# EAGLE board LimitSwitch_mshield-v3 (EAGLE 7.2.0)
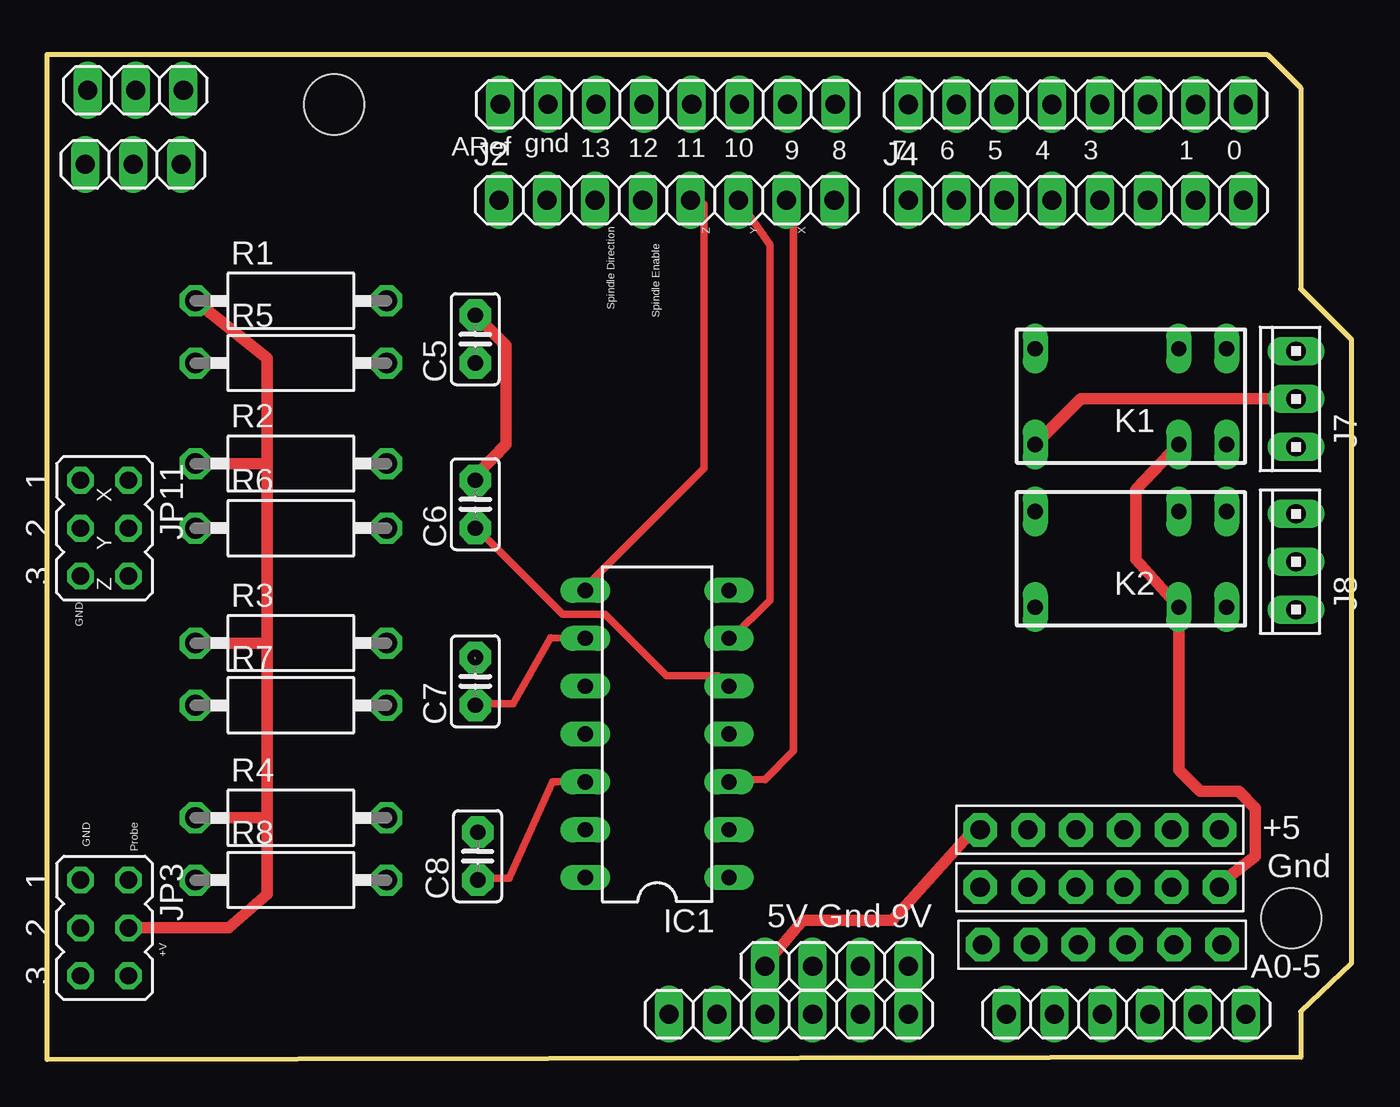
[diagram p0: board, top side]
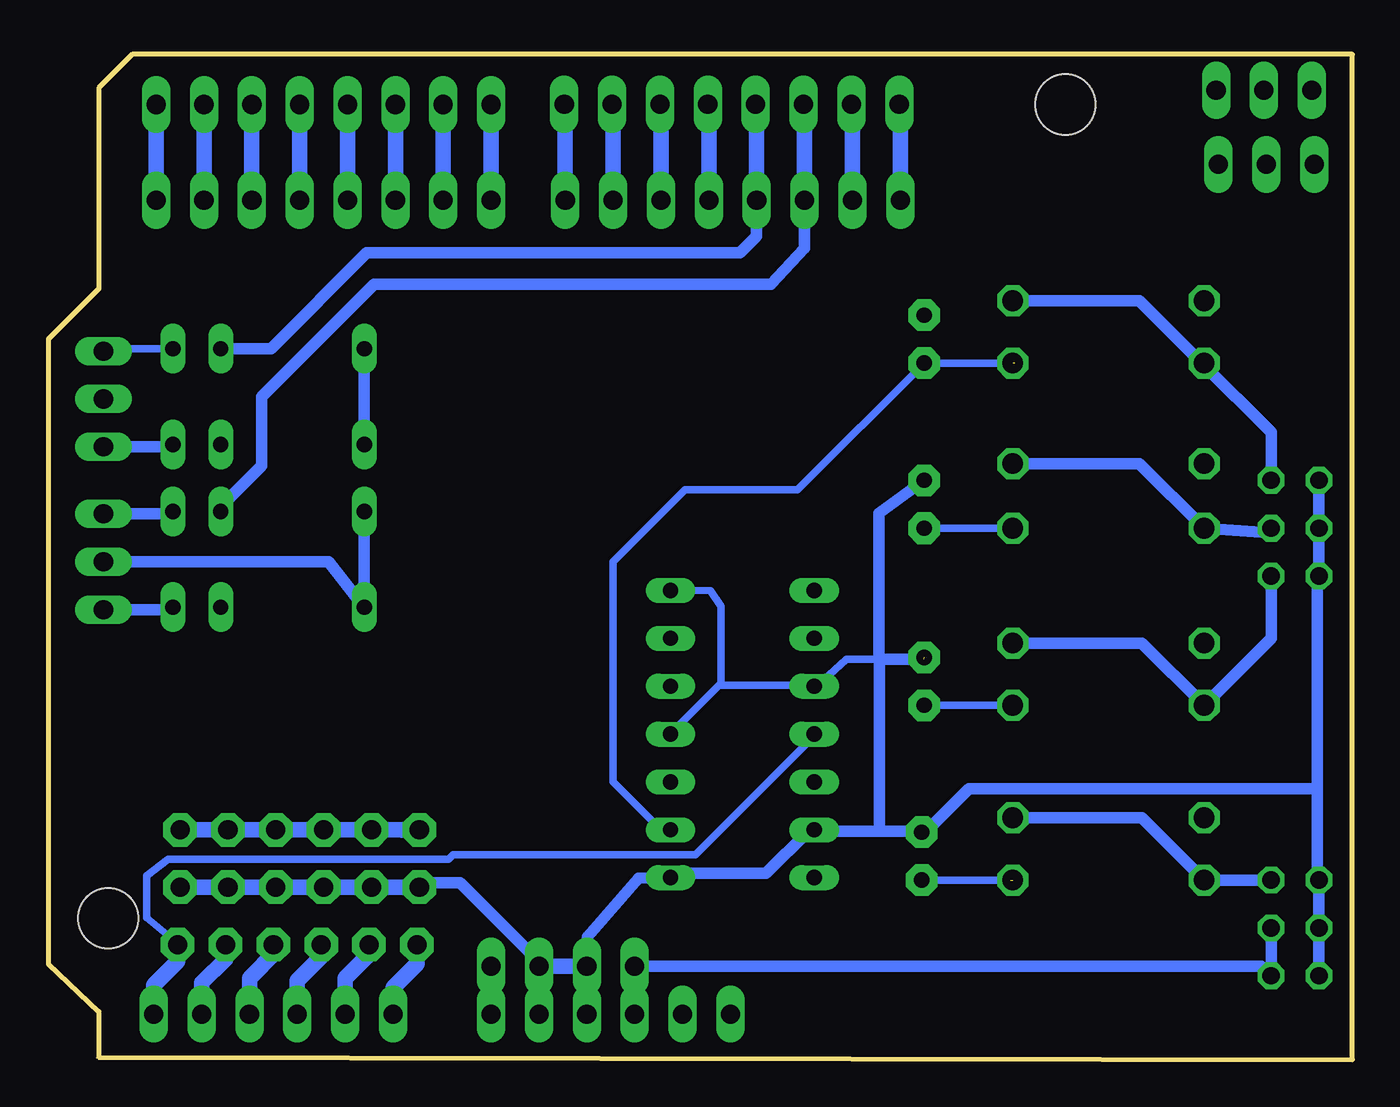
[diagram p1: board, bottom side, seen from below]

Size 69.29 x 53.35 mm. Coordinates in mm from the lower left corner, seen from the top.
Outline: 69.28,38.2 66.55,40.87 66.55,51.63 64.83,53.35 0,53.35 0,0 66.68,0.09
Outline: 69.13,5.05 69.13,5.05 66.55,2.5 66.57,0
Outline: 69.21,5.08 69.22,38.36
Copper layers (1*16): Top 0.035mm / dielectric 1.5mm / Bottom 0.035mm
Design rules "default": minimum track width 16mil, minimum drill 19mil, track to track 12mil, track to pad 12mil, pad to pad 12mil, via to via 12mil, smd to smd 0mil, copper to edge 10mil, drill to drill 8mil, minimum pad ring 10mil, minimum via ring 8mil, stop-mask expansion 4mil, vias tented up to drill 0mil, thermal gap 10mil
Net classes: 1 power: width 0.61 mm
Holes 3.2 mm at 66.04,7.5 15.24,50.68
Milling: 9 lines

## Footprints (pad centres in the part's own frame; a part is rotated, then mirrored left to right if it is on the bottom)
C025-025X050 = drill 0.813 pad 1.676 octagon: 1 -1.27,0; 2 1.27,0
DIL14 = drill 0.813 long: 1 -7.62,-3.81; 2 -5.08,-3.81; 3 -2.54,-3.81; 4 0,-3.81; 5 2.54,-3.81; 6 5.08,-3.81; 7 7.62,-3.81; 8 7.62,3.81; 9 5.08,3.81; 10 2.54,3.81; 11 0,3.81; 12 -2.54,3.81; 13 -5.08,3.81; 14 -7.62,3.81
1X08 = drill 1.016 long: 1 -8.89,0; 2 -6.35,0; 3 -3.81,0; 4 -1.27,0; 5 1.27,0; 6 3.81,0; 7 6.35,0; 8 8.89,0
10X03MTA = drill 1.016 long: 1 2.54,0; 2 0,0; 3 -2.54,0
1X06 = drill 1.016 long: 1 -6.35,0; 2 -3.81,0; 3 -1.27,0; 4 1.27,0; 5 3.81,0; 6 6.35,0
JP3Q = drill 0.914 octagon: 1 -2.54,-1.27; 2 -2.54,1.27; 3 0,-1.27; 4 0,1.27; 5 2.54,-1.27; 6 2.54,1.27
1X04 = drill 1.016 long: 1 -3.81,0; 2 -1.27,0; 3 1.27,0; 4 3.81,0
1X06-BIG = drill 1.016 pad 1.778 octagon: 1 -6.35,0; 2 -3.81,0; 3 -1.27,0; 4 1.27,0; 5 3.81,0; 6 6.35,0
G5V1 = drill 0.813 long: 1 -5.08,-2.54; 2 -2.54,-2.54; 5 5.08,-2.54; 6 5.08,2.54; 9 -2.54,2.54; 10 -5.08,2.54
VMTA55 = drill 1.1 octagon: 1 -5.08,0; 2 5.08,0
1X03 = drill 1.016 long: 1 -2.54,0; 2 0,0; 3 2.54,0

## Placement (x,y rotation side)
C5  [C025-025X050]  22.73,38.23 90 top
C6  [C025-025X050]  22.73,29.47 90 top
C7  [C025-025X050]  22.73,20.07 90 top
C8  [C025-025X050]  22.86,10.8 90 top
DRILEGEND  [DRILEGEND]  -1.65,-3.93 0 top  (outside the outline)
IC1  74LS126N  [DIL14]  32.38,17.28 90 top
J1  [1X08]  54.61,50.68 180 top
J2  [1X08]  32.89,45.6 0 top
J3  [1X08]  32.95,50.7 180 top
J4  [1X08]  54.61,45.6 0 top
J7  [10X03MTA]  66.29,35.06 90 top
J8  [10X03MTA]  66.29,26.42 90 top
JP1  [1X06]  39.37,2.42 0 top
JP2  [1X06]  57.27,2.42 0 top
JP3  [JP3Q]  3.04,6.99 270 top
JP4  [1X04]  41.91,4.96 0 top
JP5  [1X06-BIG]  56,6.1 0 top
JP8  [1X06-BIG]  55.88,12.2 0 top
JP10  [1X06-BIG]  55.88,9.15 0 top
JP11  [JP3Q]  3.04,28.2 270 top
K1  G5V1  [G5V1]  57.53,35.18 180 top
K2  G5V1  [G5V1]  57.53,26.55 180 top
R1  [VMTA55]  12.95,40.26 0 top
R2  [VMTA55]  12.95,31.63 0 top
R3  [VMTA55]  12.95,22.1 0 top
R4  [VMTA55]  12.95,12.83 0 top
R5  [VMTA55]  12.95,36.96 0 top
R6  [VMTA55]  12.95,28.2 0 top
R7  [VMTA55]  12.95,18.8 0 top
R8  [VMTA55]  12.95,9.53 0 top
SER1  [1X03]  4.7,51.44 180 top
SERVO_2  [1X03]  4.57,47.5 180 top

## Library data of the parts
C5-C8 = adafruit
DRILEGEND = drilegend
IC1 = 74xx-us
J1-J4 JP1 JP2 JP4 SER1 SERVO_2 = pinhead
J7 J8 = con-amp
JP3 JP11 = jumper
JP5 JP8 JP10 = carduino
K1 K2 = relay; MPN: G5V-1-DC24; OC_FARNELL: 9949593; OC_NEWARK: 36M6377
R1-R8 = resistor

## Nets
9V: JP1.6 JP4.4
GND [power]: C5.2 C6.2 C7.2 C8.2 IC1.1 IC1.4 IC1.7 IC1.10 IC1.13 JP1.4 JP1.5 JP3.1 JP3.3 JP3.5 JP4.2 JP4.3 JP10.1 JP10.2 JP10.3 JP10.4 JP10.5 JP10.6 JP11.1 JP11.3 JP11.5 K1.9 K2.9
N$1: J7.2 K1.5 K1.6
N$2: JP2.1 JP5.1
N$3: JP2.2 JP5.2
N$4: JP2.3 JP5.3
N$5: JP2.4 JP5.4
N$6: JP2.5 JP5.5
N$7: J2.8 J3.1
N$8: IC1.11 JP2.6 JP5.6
N$9: IC1.6 J2.6 J3.3
N$10: IC1.8 J2.5 J3.4
N$11: J2.4 J3.5 K1.2
N$12: J2.3 J3.6 K2.2
N$13: J8.2 K2.5 K2.6
N$14: J2.2 J3.7
N$15: J2.1 J3.8
N$16: J1.8 J4.1
N$17: J1.7 J4.2
N$18: J1.6 J4.3
N$19: J1.5 J4.4
N$20: J1.4 J4.5
N$21: J1.3 J4.6
N$22: J1.2 J4.7
N$23: J1.1 J4.8
N$25: JP11.2 R1.2 R5.1
N$26: J7.1 K1.1
N$27: C6.1 IC1.5 R6.2
N$28: JP11.4 R2.2 R6.1
N$29: C7.1 IC1.9 R7.2
N$30: JP11.6 R3.2 R7.1
N$31: C8.1 IC1.12 R8.2
N$32: JP3.2 R4.2 R8.1
N$33: IC1.3 J2.7 J3.2
N$34: J7.3 K1.10
N$35: J8.1 K2.1
N$36: J8.3 K2.10
N$37: C5.1 IC1.2 R5.2
V+: JP1.3 JP3.4 JP3.6 JP4.1 JP8.1 JP8.2 JP8.3 JP8.4 JP8.5 JP8.6 R1.1 R2.1 R3.1 R4.1
VCC: IC1.14

## Tracks (layer width: path | path; a pad name or v marks a point on that pad's centre or on a via)
9V
  Bottom 0.813: JP1.6 45.72,4.2 45.59,4.32 45.72,4.45 JP4.4
GND  (1 unrouted)
  Top 0.61: K1.9 57.78,30.23 57.78,26.55 K2.9 60.07,15.37 61.21,14.23 63.24,14.23 64.13,13.34 64.13,10.8 62.48,9.53 JP10.6 | 22.87,39.63 C5.2 22.87,39.38 24.37,37.88 24.37,32.65 22.87,31.13 C6.2 22.87,30.88
  Bottom 0.406: 25.13,21.26 26.86,21.26 28.37,19.88 IC1.10 28.87,19.88 33.52,19.88 | 33.52,19.88 33.62,19.88 36.12,17.38 IC1.4 | IC1.7 34.08,24.88 33.52,24.07 33.52,19.88 | 22.86,21.21 C7.2
  Bottom 0.61: JP11.1 JP11.3 JP11.5 1.87,25.38 1.87,14.38 | JP3.5 JP3.3 JP3.1 1.87,9.63 1.87,14.38 | JP10.1 49.24,9.38 47.37,9.38 43.37,5.38 JP4.3 43.12,5.25 | 22.74,21.26 25.12,21.26 | 25.12,21.26 25.13,21.26 25.13,29 22.87,30.63 C6.2 | 25.12,12.13 22.87,12.13 C8.2 22.62,12.13 20.37,14.38 1.87,14.38 | 25.12,12.13 28.37,12.13 IC1.13 28.87,12.13 31.12,9.88 36.12,9.88 IC1.1 37.89,9.63 40.61,6.53 JP4.2 | 25.12,12.13 25.12,21.26
  Bottom 0.813: JP10.6 JP10.5 57.27,9.15 57.15,9.02 JP10.4 JP10.3 | JP10.3 54.35,9.15 | JP10.2 51.81,9.15 | JP10.2 JP10.3 | JP10.1 JP10.2 | JP1.4 JP4.2 JP4.3 JP1.5
N$1
  Top 0.406: 66.29,35.08 J7.2
  Top 0.61: K1.6 54.86,35.06 J7.2 66.42,35.06
  Bottom 0.406: K1.6 52.42,32.59 52.45,32.77
  Bottom 0.61: K1.5 52.45,32.77
N$2
  Bottom 0.813: JP5.1 49.65,5.09 50.92,3.82 JP2.1 50.8,2.42
N$3
  Bottom 0.813: JP5.2 52.32,6.1 52.19,5.97 52.19,5.59 53.46,4.32 JP2.2
N$4
  Bottom 0.813: JP2.3 56,4.2 54.73,5.47 JP5.3
N$5
  Bottom 0.813: 57.4,5.85 57.27,5.97 JP5.4 57.27,5.85 57.15,5.72 58.54,4.32 JP2.4
N$6
  Bottom 0.813: JP5.5 59.69,6.1 59.81,5.97 59.81,5.34 61.08,4.07 JP2.5
N$7
  Bottom 0.406: J3.1 41.93,50.73 41.78,50.73
  Bottom 0.813: J2.8 41.78,50.73 41.78,50.81
N$8
  Bottom 0.406: IC1.11 28.62,17.13 34.87,10.88 47.72,10.88 47.97,10.63 62.87,10.63 63.99,9.76 63.99,7.52 62.62,6.38 JP5.6
  Bottom 0.813: JP5.6 62.35,5.21 63.62,3.94 JP2.6
N$9
  Top 0.406: 36.62,45.63 J2.6 36.87,45.38 38.37,43.24 38.37,24.38 36.37,22.38 IC1.6
  Bottom 0.406: J3.3 36.78,50.73 36.7,50.68
  Bottom 0.813: J2.6 36.7,50.68
N$10
  Top 0.406: IC1.8 28.62,25.13 34.87,31.38 34.87,45.38 34.37,45.38 J2.5
  Bottom 0.406: J3.4 34.29,50.73 34.16,50.68
  Bottom 0.813: J2.5 34.16,50.68
N$11
  Bottom 0.406: J3.5 31.8,50.73 31.62,50.68
  Bottom 0.61: J2.4 31.62,43.69 32.51,42.8 52.32,42.8 57.4,37.72 K1.2
  Bottom 0.813: J2.4 31.62,50.68
N$12
  Bottom 0.406: J3.6 29.13,50.73 29.08,50.68
  Bottom 0.61: K2.2 59.81,29.6 57.91,31.5 57.91,35.18 51.94,41.15 30.86,41.15 29.08,43.06 J2.3
  Bottom 0.813: J2.3 29.08,50.68
N$13
  Bottom 0.406: 66.29,26.37 J8.2
  Bottom 0.61: 66.42,26.42 J8.2 54.35,26.42 K2.6 K2.5
N$14
  Bottom 0.406: J3.7 26.64,50.73 26.54,50.68
  Bottom 0.813: J2.2 26.54,50.68
N$15
  Bottom 0.406: J3.8 24.15,50.73 24,50.68
  Bottom 0.813: J2.1 24,50.68
N$16
  Bottom 0.813: J4.1 J1.8
N$17
  Bottom 0.813: J4.2 J1.7
N$18
  Bottom 0.813: J4.3 J1.6
N$19
  Bottom 0.813: J4.4 J1.5
N$20
  Bottom 0.813: J4.5 J1.4
N$21
  Bottom 0.813: J4.6 J1.3
N$22
  Bottom 0.813: J4.7 J1.2
N$23
  Bottom 0.406: J4.8 63.62,45.57 63.5,45.73
  Bottom 0.813: 63.5,45.73 J1.1
N$25
  Bottom 0.406: R5.1 7.97,37.04 8.02,36.99
  Bottom 0.61: R1.2 11.3,40.26 8.02,36.99 4.31,33.28 JP11.2
N$26
  Bottom 0.406: K1.1 66.29,37.72 J7.1
N$27
  Top 0.406: IC1.5 36.12,19.88 35.62,20.38 32.87,20.38 29.62,23.63 27.37,23.63 22.87,28.13 C6.1 | 18.12,28.13 R6.2
  Bottom 0.406: R6.2 C6.1
N$28
  Bottom 0.406: JP11.4 4.42,28.15 4.43,27.96
  Bottom 0.61: R2.2 11.3,31.63 R6.1 4.43,27.96 4.19,27.95
N$29
  Top 0.406: IC1.9 26.71,22.38 24.73,18.88 22.87,18.88 C7.1 | 18.12,18.88 R7.2
  Bottom 0.406: 18.16,18.8 18.11,18.9 R7.2 C7.1
N$30
  Bottom 0.61: R3.2 11.17,22.1 R7.1 4.31,22.36 JP11.6
N$31  (1 unrouted)
  Top 0.406: IC1.12 26.84,14.76 24.51,9.63 22.87,9.63 C8.1 | 18.12,9.63 R8.2
  Bottom 0.406: 18.16,9.53 C8.1
N$32
  Bottom 0.61: R4.2 11.17,12.83 R8.1 JP3.2
N$33
  Top 0.406: 39.24,45.5 J2.7 39.62,45.51 39.62,16.39 38.1,14.86 36.37,14.88 IC1.3
  Bottom 0.406: J3.2 39.26,50.73 39.24,50.73
  Bottom 0.813: J2.7 39.24,50.73 39.24,50.81
N$34
  Bottom 0.61: K1.10 62.73,32.52 J7.3
N$35
  Bottom 0.61: K2.1 63.24,28.96 J8.1
N$36
  Bottom 0.61: K2.10 63.24,23.88 J8.3
N$37  (1 unrouted)
  Bottom 0.406: IC1.2 36.7,12.2 39.24,14.74 39.24,26.42 35.43,30.23 29.46,30.23 C5.1 17.9,36.96
V+
  Top 0.406: 49.11,12.13 JP8.1 | 38.12,5 JP4.1
  Top 0.61: R3.1 11.68,22.1 | 11.68,22.1 11.68,31.63 | 11.68,31.63 11.68,37.22 R1.1 | R2.1 11.68,31.63 | R4.1 11.68,12.83 | 11.68,12.83 11.68,22.1 | 11.68,12.83 11.68,8.77 9.65,6.99 JP3.4 | 49.11,12.13 44.87,7.38 40.12,7.38 38.12,5
  Bottom 0.406: 50.47,11.97 50.47,12.2
  Bottom 0.61: JP3.4 JP3.6 4.82,4.96 JP4.1
  Bottom 0.813: JP1.3 JP4.1 | JP8.1 50.47,12.2 JP8.2 JP8.3 JP8.4 JP8.5 JP8.6

## Text on the board
tPlace: ARef | gnd | 13 | 12 | 11 | 10 | 9 | 8 | 7 | 6 | 5 | 4 | 3 | 1 | 0 | Spindle Direction | Z | Y | X | Spindle Enable | X | Y | Z | GND | +5 | GND | Probe | Gnd | +V | A0-5
tNames: 5V Gnd 9V
DrillLegend: LAYER-STACK
DrillLegend_01-16: 01-16
DrillLegend_01-20: 01-20